# Altium PCB Amplificador Clase D.PcbDoc
Units mil, origin at the board's own origin, x right, y up, seen from the top; angles counter-clockwise.
Board outline 6000 x 4000 mil, 2 copper layers (Top Layer, Bottom Layer); 97 components, 79 nets, 264 pads, 24 vias.
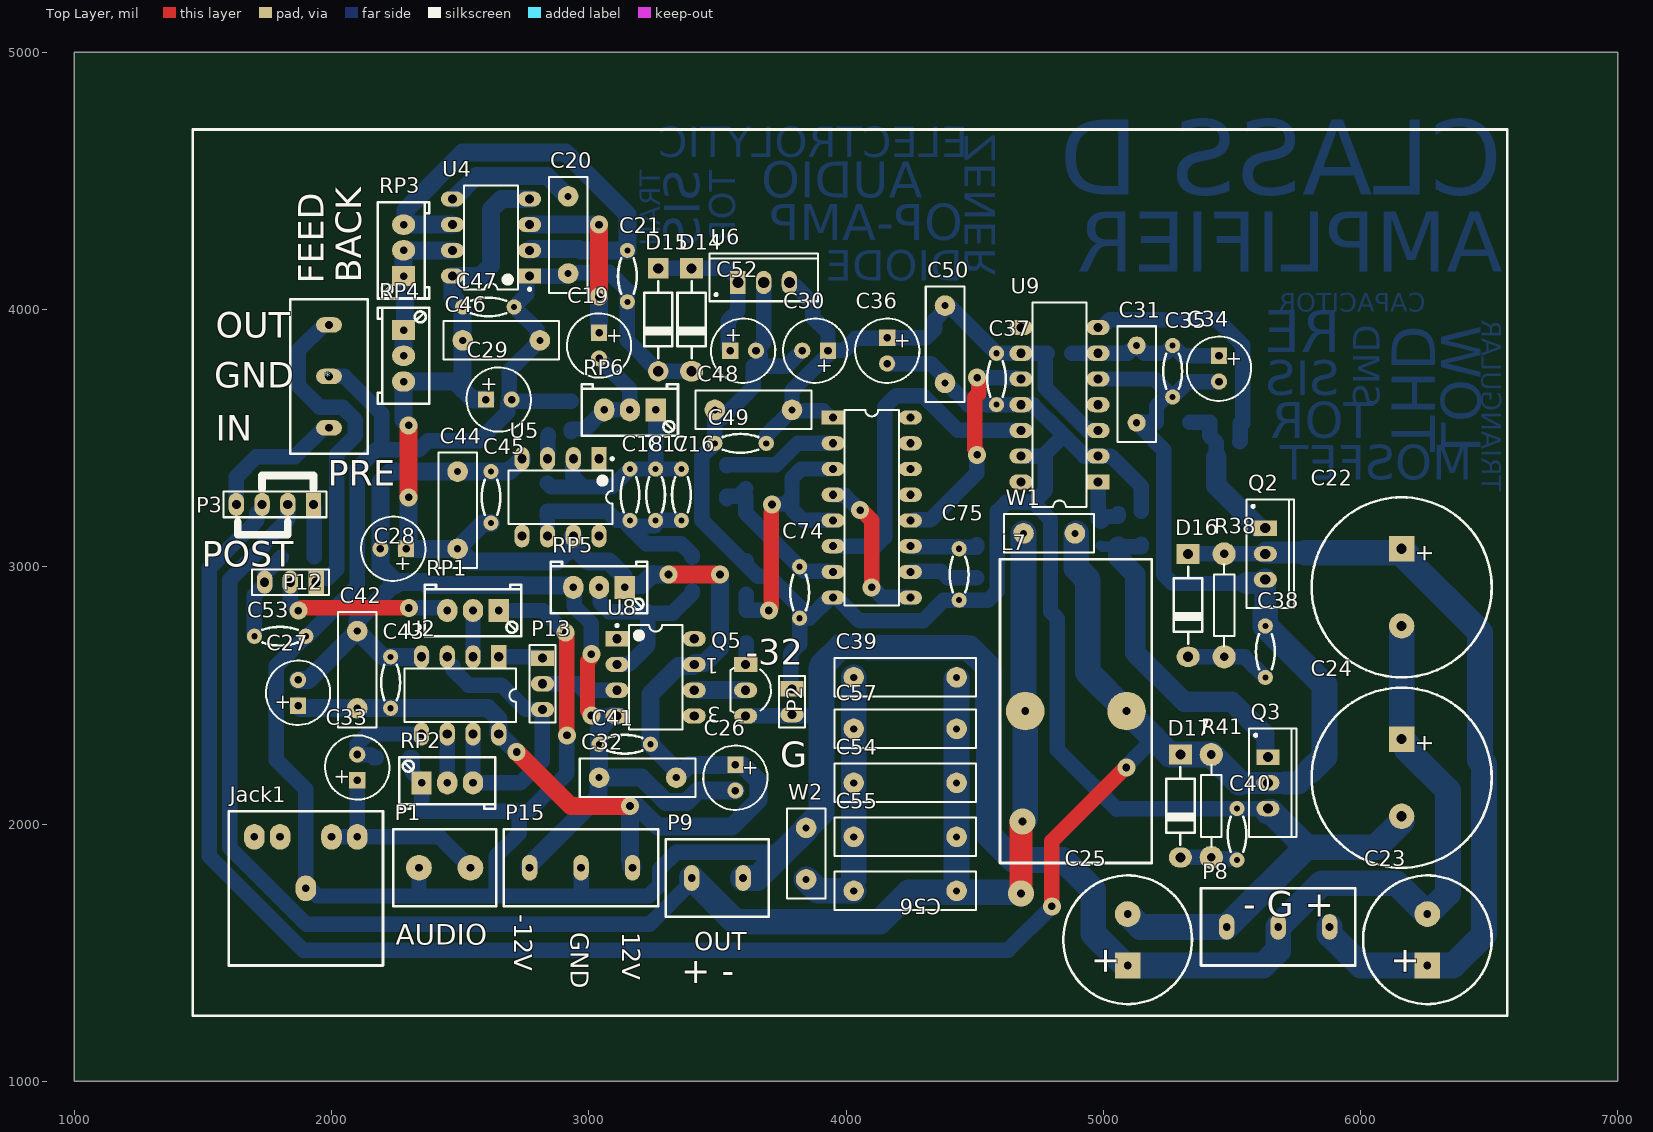
[diagram p0: Top Layer view]
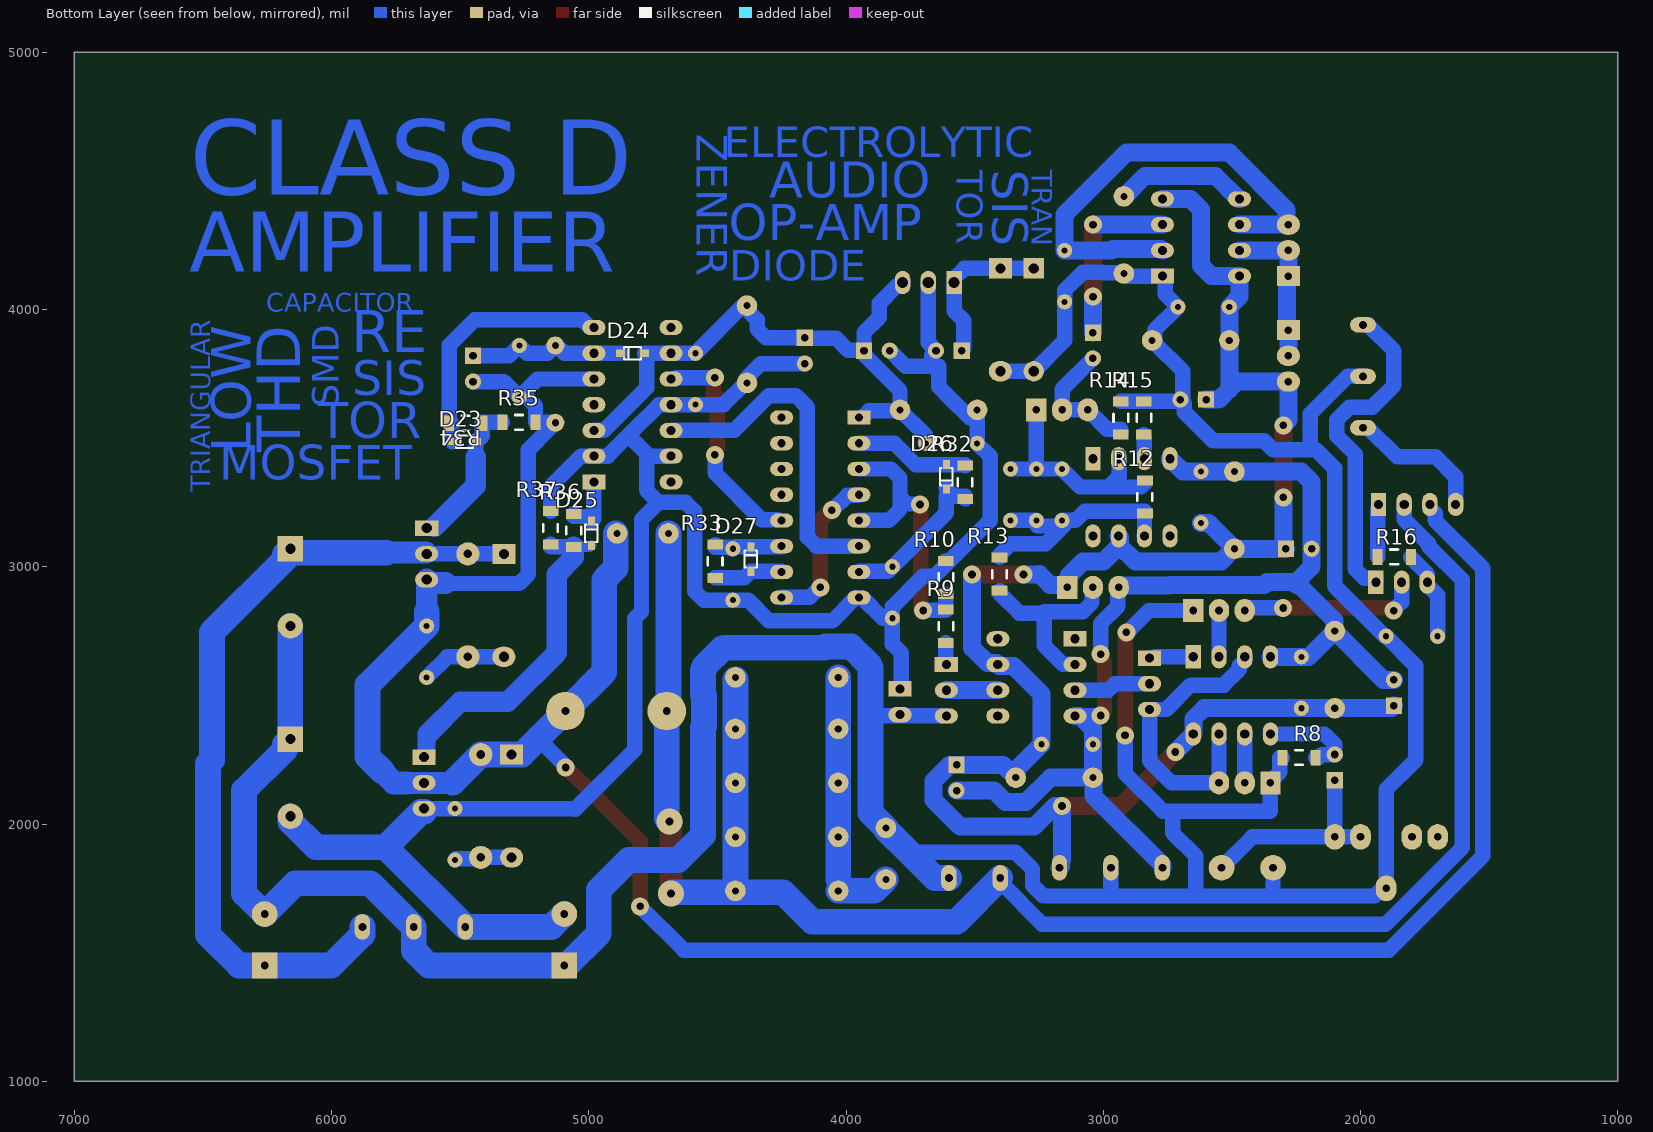
[diagram p1: Bottom Layer view, seen from below]

## Layer stack, top to bottom
Top Solder: solder mask 0.4, Solder Resist, Dk 3.5
Top Layer: signal copper 1.4
Dielectric 1: dielectric 12.6, FR-4, Dk 4.8
Bottom Layer: signal copper 1.4
Bottom Solder: solder mask 0.4, Solder Resist, Dk 3.5

## Board outline
1000,1000 7000,1000 7000,5000 1000,5000

## Design rules (kind name [scope] priority, off if disabled: settings)
Clearance [All] p1: gap=40 ignorepadtopadclearanceinfootprint=FALSE except(0: Arc-Hole Track-Hole SMDPad-Hole THPad-Hole Via-Hole Fill-Text Fill-Hole Poly-Text Poly-Hole Region-Text Region-Hole Text-Hole; 10: Arc-Text Track-Text SMDPad-SMDPad SMDPad-THPad SMDPad-Via SMDPad-Text THPad-THPad THPad-Via THPad-Text Via-Via Via-Text Text-Text; 20: Arc-Arc Arc-Track Arc-SMDPad Arc-THPad Track-Track Track-SMDPad Track-THPad; 30: Arc-Via Track-Via)
PolygonConnect [All] p1: connectstyle=Relief reliefconductorwidth=10 reliefentries=4 polygonreliefangle="90 Angle" airgapwidth=10
RoutingVias [All] p1: holewidth=30 width=70 viastyle="Through Hole" minholewidth=30 minwidth=70 maxholewidth=30 maxwidth=70
SilkToSilkClearance [All] p1: silktosilkclearance=0
SilkToSolderMaskClearance [IsPad] p1: minsilkscreentomaskgap=0 clearancetoexposedcopper=TRUE
SolderMaskExpansion [All] p1: expansion=4 istentingtop=FALSE
Width [All] p1: maxlimit=150 minlimit=20 preferedwidth=60 minimp=50.000000 maximp=50.000000 favimp=50.000000
28 further rules are at their usual default settings.

## Classes and differential pairs
component class Feedback: * C53 P3 P12 R16
component class "Positive Pwr": *2
component class "Negative Pwr": *3
component class Triangular: C16 C17 C18 C19 C20 C21 R12 R13 R14 R15 RP3 RP4 RP5 RP6 U4 U5
component class "Mosfet Driver": C31 C34 C35 C36 C37 C50 D23 D24 D25 R34 R35 R36 R37 U9
component class "Generador De Retardo": C74 C75 D26 D27 R32 R33
component class "Amplificador Clase D": C22 C23 C24 C25 C26 C27 C28 C29 C30 C32 C33 C38 C39 C40 C41 C42 C43 C44 C45 C46 C47 C48 C49 C52 C54 C55 C56 C57 D14 D15 D16 D17 Jack1 L7 P1 P2 P8 P9 P13 P15 Q2 Q3 Q5 R8 R9 R10 R38 R41 RP1 RP2 U2 U6 U8 W1 W2

## Components (designator, comment, footprint, x,y, rotation, side; value= is the part's Value field where it differs from the comment)
* "Bornera 3" "bornera 3" 1990,3540 r90 top
C16 "Cap Ceramico Disco" "CAP DISCO 200mil" 3360,3280 r90 top
C17 "Cap Ceramico Disco" "CAP DISCO 200mil" 3260,3280 r90 top
C18 "Cap Ceramico Disco" "CAP DISCO 200mil" 3160,3280 r90 top
C19 "Cap Electrolitico Radial" "CAPR D250 H450 R100 mil" 3040,3860 r270 top
C20 "Cap Ceramico Disco" RAD-0.3#1 2920,4290 r90 top
C21 "Cap Ceramico Disco" "CAP DISCO 200mil" 3150,4130 r90 top
C22 "Cap Pol1" "CAPR D700 H1400 R300 mil" 6160,2920 r270 top value=470uF/200V
C23 "Cap Pol1" "CAPR D500 H1000 R200 mil" 6260,1550 r90 top value=220uF/100V
C24 "Cap Pol1" "CAPR D700 H1400 R300 mil" 6160,2180 r270 top value=470uF/200V
C25 "Cap Pol1" "CAPR D500 H1000 R200 mil" 5095,1550 r90 top value=220uF/100V
C26 "Cap Electrolitico Radial" "CAPR D250 H450 R100 mil" 3570,2180 r270 top
C27 "Cap Electrolitico Radial" "CAPR D250 H450 R100 mil" 1870,2510 r90 top
C28 "Cap Electrolitico Radial" "CAPR D250 H450 R100 mil" 2240,3070 r180 top
C29 "Cap Electrolitico Radial" "CAPR D250 H450 R100 mil" 2650,3650 r0 top
C30 "Cap Electrolitico Radial" "CAPR D250 H450 R100 mil" 3880,3840 r180 top
C31 "Cap Ceramico Disco" RAD-0.3#2 5130,3710 r90 top
C32 "Cap Ceramico Disco" RAD-0.3#1 3190,2180 r0 top
C33 "Cap Pol1" "CAPR D250 H450 R100 mil" 2100,2220 r90 top value=10uF
C34 "Cap Pol1" "CAPR D250 H450 R100 mil" 5450,3770 r270 top value=10uF
C35 "Cap" "CAP DISCO 200mil" 5270,3760 r90 top value=0.1uF
C36 "Cap Pol1" "CAPR D250 H450 R100 mil" 4160,3840 r270 top value=10uF
C37 "Cap" "CAP DISCO 200mil" 4585,3730 r90 top value=0.1uF
C38 "Cap" "CAP DISCO 200mil" 5630,2670 r270 top value=1nF
C39 "Cap" RAD-0.4 4230,2570 r0 top value=100nF
C40 "Cap" "CAP DISCO 200mil" 5520,1960 r270 top value=1nF
C41 "Cap" "CAP DISCO 200mil" 3140,2310 r0 top value=1nF
C42 "Cap Ceramico Disco" RAD-0.3#1 2100,2600 r270 top
C43 "Cap" "CAP DISCO 200mil" 2230,2550 r270 top value=1nF
C44 "Cap Ceramico Disco" RAD-0.3#1 2490,3220 r270 top
C45 "Cap" "CAP DISCO 200mil" 2620,3270 r270 top value=1nF
C46 "Cap Ceramico Disco" RAD-0.3#1 2660,3880 r180 top
C47 "Cap" "CAP DISCO 200mil" 2610,4010 r180 top value=1nF
C48 "Cap Ceramico Disco" RAD-0.3#1 3640,3610 r0 top
C49 "Cap" "CAP DISCO 200mil" 3590,3480 r0 top value=1nF
C50 "Cap Ceramico Disco" RAD-0.3#1 4385,3865 r90 top
C52 "Cap Electrolitico Radial" "CAPR D250 H450 R100 mil" 3600,3840 r0 top
C53 "Cap" "CAP DISCO 200mil" 1800,2730 r180 top value=4.7nF
C54 "Cap" RAD-0.4 4230,2160 r0 top value=68nF
C55 "Cap" RAD-0.4 4230,1950 r0 top value=100nF
C56 "Cap" RAD-0.4 4230,1740 r0 top value=100nF
C57 "Cap" RAD-0.4 4230,2370 r0 top value=100nF
C74 "Cap" "CAP DISCO 200mil" 3820,2900 r90 top value=47pF
C75 "Cap" "CAP DISCO 200mil" 4440,2970 r90 top value=47pF
D14 "Diodo Zener" DO-41#1 3400,3960 r270 top
D15 "Diodo Zener" DO-41#2 3270,3960 r270 top
D16 "Diode 1N4148" DO-41#1 5330,2850 r270 top
D17 "Diode 1N4148" DO-41#1 5300,2070 r270 top
D23 "Diode 1N4148" SOD323-F 5483.5,3486.24 r180 bottom
D24 "Diode 1N4148" SOD323-F 4830,3830 r180 bottom
D25 "Diode 1N4148" SOD323-F 4990,3130 r270 bottom
D26 "Diode 1N4148" SOD323-F 3610,3350 r90 bottom
D27 "Diode 1N4148" SOD323-F 4370,3030 r270 bottom
Jack1 "Jack 3.5mm" "jack 3.5mm" 2100,1950 r180 top
L7 "Inductor" "Bobina 1.5*3" 4880,2450 r180 top value=33uH
P1 "Header 2H" "bornera 2"#1 2340,1830 r0 top
P2 "Header 2" HDR1X2 3790,2525 r270 top
P3 "Header 4" HDR1X4 1930,3242.5 r180 top
P8 "Header 3" "bornera 3" 5480,1600 r0 top
P9 "Header 2H" "bornera 2"#2 3400,1790 r0 top
P12 "Header 3" HDR1X3 1940,2940 r180 top
P13 "Header 3" HDR1X3 2820,2645 r270 top
P15 "Header 3" "bornera 3" 2770,1830 r0 top
Q2 "IRFZ24N" TO-220AB 5630,3050 r270 top
Q3 "IRFZ24N" TO-220AB 5640,2160 r270 top
Q5 "BS250" TO-92W 3610,2520 r180 top
R8 "Res2" "1206 resistor" 2240,2260 r180 bottom value=47K
R9 "Res1" "1206 resistor" 3610,2770 r270 bottom value=47K
R10 "Res1" "1206 resistor" 3610,2960 r270 bottom value=22K
R12 "Res SMD" "1206 resistor" 2840,3270 r90 bottom
R13 "Res SMD" "1206 resistor" 3405,2970 r90 bottom
R14 "Res SMD" "1206 resistor" 2930,3580 r270 bottom
R15 "Res SMD" "1206 resistor" 2840,3580 r270 bottom
R16 "Res1" "1206 resistor" 1870,3040 r180 bottom value=1k
R32 "Rtiempo" "1206 resistor" 3538.5,3327.24 r90 bottom value=1K5
R33 "Res2" "1206 resistor" 4510,3020 r90 bottom value=1K5
R34 "Res2" "1206 resistor" 5480,3560 r180 bottom value=10
R35 "Res2" "1206 resistor" 5270,3560 r0 bottom value=1K
R36 "Res2" "1206 resistor" 5060,3140 r90 bottom value=10
R37 "Res2" "1206 resistor" 5150,3150 r90 bottom value=1K
R38 "Res2" AXIAL-0.4 5470,2850 r90 top value=39
R41 "Res2" AXIAL-0.4 5420,2070 r90 top value=39
RP1 "Trimpot" "Trimpot Multivuelta Vertical" 2550,2830 r0 top
RP2 "Trimpot" "Trimpot Multivuelta Vertical" 2450,2160 r180 top
RP3 "Trimpot" "Trimpot Multivuelta Vertical" 2280,4230 r270 top
RP4 "Trimpot" "Trimpot Multivuelta Vertical" 2280,3820 r90 top
RP5 "Trimpot" "Trimpot Multivuelta Vertical" 3040,2920 r0 top
RP6 "Trimpot" "Trimpot Multivuelta Vertical" 3160,3610 r0 top
U2 "TL082ACJG" 693-02 2500,2500 r180 top
U4 "LM555CN" N08E 2620,4280 r180 top
U5 "LM318N" DIP-8 2890,3270 r270 top
U6 "LM78L12ACZ/NOPB" to-220 3680,4105 r0 top
U8 "LM318N" DIP-8 3260,2570 r0 top
U9 "IR2110" PDIP14 4830,3630 r90 top
W1 "Jumper" RAD-0.2 4790,3130 r180 top
W2 "Jumper" RAD-0.2 3845,1885 r270 top
? "CD4049" PDIP16 4100,3230 r270 top

## Footprints (in the part's own frame and the unit in brackets; to place one, negate y for a bottom-side part, rotate by r counter-clockwise, add the part's x,y. Pads: shape width x height; smd on the part's side, far side on the other; paste and mask are expansions set on the pad)
693-02 [mm] "DIP; 8 Leads; Row Spacing 7.62 mm; Pitch 2.54 mm"
  rect 1.5x2.286 hole 0.9: 1(-3.81,-3.81)
  oval 1.5x2.286 hole 0.9: 2(-1.27,-3.81) 3(1.27,-3.81) 4(3.81,-3.81) 5(3.81,3.81) 6(1.27,3.81) 7(-1.27,3.81) 8(-3.81,3.81)
  silkscreen extent -5.5,-2.65 5.5,2.65
"1206 resistor" [mil]
  rect 39x61 smd: 1(-63,-2) 2(66,-2)
  silkscreen extent -14,-30 16,27
AXIAL-0.4 [mil] "Axial Device, Thru-Hole; 2 Leads; 0.4 in Pin Spacing"
  round 90 hole 33.46: 1(-200,0) 2(200,0)
  silkscreen extent -160,-40 160,40
"Bobina 1.5*3" [mil]
  round 150 hole 30: 1(-210.7,11) 2(183,11)
  silkscreen extent -309,-580 281,602
"bornera 2"#1 [mil]
  round 100 hole 30: 1(0,0) 2(200,0)
  silkscreen extent -100,-150 300,150
"bornera 2"#2 [mil]
  oval 60x100 hole 30: 1(0,0) 2(200,0)
  silkscreen extent -100,-150 300,150
"bornera 3" [mil]
  oval 60x100 hole 30: 1(0,0) 2(200,0) 3(400,0)
  silkscreen extent -100,-150 500,150
"CAP DISCO 200mil" [mm] "Capacitor; 2 Leads"
  round 1.5 hole 0.6: 1(-2.54,0) 2(2.54,0)
  silkscreen extent -1.74,-0.93 1.74,0.93, body extent -3.5,-0.85 3.49,0.85, height 7.5
"CAPR D250 H450 R100 mil" [mm]
  rect 1.6x1.6 hole 0.75: 1(-1.27,0)
  round 1.6 hole 0.75: 2(1.27,0)
  silkscreen extent -3.17,-3.17 3.17,3.17, body extent -3.4,-3.39 3.37,3.39, height 2.49
"CAPR D500 H1000 R200 mil" [mil]
  rect 100x100 hole 30: 1(-100,0)
  round 100 hole 30: 2(100,0)
  silkscreen extent -250,-250 250,250
"CAPR D700 H1400 R300 mil" [mm]
  rect 2.5x2.5 hole 1: 1(-3.81,0)
  round 2.5 hole 1: 2(3.81,0)
  silkscreen extent -8.89,-8.89 8.89,8.89, body extent -9.25,-9.22 9.17,9.22, height 2.49
DIP-8 [mm] "DIP; 8 Leads; Row Spacing 7.62 mm; Pitch 2.54 mm"
  rect 2.286x1.5 hole 0.9: 1(-3.81,3.81)
  oval 2.286x1.5 hole 0.9: 2(-3.81,1.27) 3(-3.81,-1.27) 4(-3.81,-3.81) 5(3.81,-3.81) 6(3.81,-1.27) 7(3.81,1.27) 8(3.81,3.81)
  silkscreen extent -3.93,-5.15 2.65,5.24, body extent -3.6,-5.15 3.6,5.15, height 5.08
DO-41#1 [mm] "Diode, Axial; Body 5.2 x 2.7 mm (LxDia. max), Lead Dia. 0.86 mm (max)"
  rect 2x2.286 hole 1: 1(-5.08,0)
  oval 2x2.286 hole 1: 2(5.08,0)
  silkscreen extent -3.81,-1.4 3.81,1.4, body extent -5.54,-1.37 5.49,1.35, height 2.72
DO-41#2 [mm] "Diode, Axial; Body 5.2 x 2.7 mm (LxDia. max), Lead Dia. 0.86 mm (max)"
  rect 2x2 hole 1: 1(-5.08,0)
  round 2 hole 1: 2(5.08,0)
  silkscreen extent -3.81,-1.4 3.81,1.4, body extent -5.54,-1.37 5.49,1.35, height 2.72
HDR1X2 [mil] "Connector; Header; 2 Position"
  rect 60x90 hole 35.43: 1(0,0)
  oval 60x90 hole 35.43: 2(100,0)
  silkscreen extent -50,-50 150,50
HDR1X3 [mil] "Connector; Header; 3 Position"
  rect 60x90 hole 35.43: 1(0,0)
  oval 60x90 hole 35.43: 2(100,0) 3(200,0)
  silkscreen extent -50,-50 250,50
HDR1X4 [mil] "Connector; Header; 4 Position"
  rect 60x90 hole 35.43: 1(0,0)
  oval 60x90 hole 35.43: 2(100,0) 3(200,0) 4(300,0)
  silkscreen extent -50,-50 350,50
"jack 3.5mm" [mil]
  oval 80x100 hole 30: 1(0,0) 1(100,0) 2(300,0) 2(400,0) 3(200,200)
  Top Layer region: 400,400
  silkscreen extent -100,-100 500,500
N08E [mm] "DIP, 8-Leads, Row Spacing 7.62mm, Pitch 2.54mm, Body 9.91x6.35mm"
  rect 2.286x1.5 hole 0.9: 1(-3.81,3.81)
  oval 2.286x1.5 hole 0.9: 2(-3.81,1.27) 3(-3.81,-1.27) 4(-3.81,-3.81) 5(3.81,-3.81) 6(3.81,-1.27) 7(3.81,1.27) 8(3.81,3.81)
  silkscreen extent -3.94,-5.15 2.65,5.23, body extent -3.6,-5.15 3.6,5.15, height 5.34
PDIP14 [mm] "DIP; 14 Leads; Row Spacing 7.62 mm; Pitch 2.54 mm"
  rect 1.5x2.286 hole 0.9: 1(-7.62,-3.81)
  oval 1.5x2.286 hole 0.9: 2(-5.08,-3.81) 3(-2.54,-3.81) 4(0,-3.81) 5(2.54,-3.81) 6(5.08,-3.81) 7(7.62,-3.81) 8(7.62,3.81) 9(5.08,3.81) 10(2.54,3.81) 11(0,3.81) 12(-2.54,3.81) 13(-5.08,3.81) 14(-7.62,3.81)
  silkscreen extent -10.1,-2.65 10.1,2.65
PDIP16 [mm] "DIP; 16 Leads; Row Spacing 7.62 mm; Pitch 2.54 mm"
  rect 1.4x2.286 hole 0.8: 1(-8.89,-3.81)
  oval 1.4x2.286 hole 0.8: 2(-6.35,-3.81) 3(-3.81,-3.81) 4(-1.27,-3.81) 5(1.27,-3.81) 6(3.81,-3.81) 7(6.35,-3.81) 8(8.89,-3.81) 9(8.89,3.81) 10(6.35,3.81) 11(3.81,3.81) 12(1.27,3.81) 13(-1.27,3.81) 14(-3.81,3.81) 15(-6.35,3.81) 16(-8.89,3.81)
  silkscreen extent -9.65,-2.7 9.65,2.7
RAD-0.2 [mil] "Radial Cap, Thru-Hole; 2 Leads; 0.2 in Pin Spacing"
  round 80 hole 27.56: 1(-100,0) 2(100,0)
  silkscreen extent -175,-75 175,75
RAD-0.3#1 [mil] "Radial Cap, Thru-Hole; 2 Leads; 0.3 in Pin Spacing"
  round 80 hole 27.56: 1(-150,0) 2(150,0)
  silkscreen extent -225,-75 225,75
RAD-0.3#2 [mil] "Radial Cap, Thru-Hole; 2 Leads; 0.3 in Pin Spacing"
  round 70 hole 27.56: 1(-150,0) 2(150,0)
  silkscreen extent -225,-75 225,75
RAD-0.4 [mil] "Radial Cap, Thru-Hole; 2 Leads; 0.4 in Pin Spacing"
  round 80 hole 27.56: 1(-200,0) 2(200,0)
  silkscreen extent -275,-75 275,75
SOD323-F [mm]
  rect 0.9x0.7 smd: 1(1.2,0) 2(-1.2,0)
  silkscreen extent -0.85,-0.63 0.85,0.62, body extent -1.15,-0.6 1.15,0.6, height 1.07
TO-92W [mm] "TO, Flat Index; 3 In-Line, Axial Leads (Wide Pitch); Body Dia. 4.7mm; Leads 0.56 x 0.51 mm (max)"
  rect 2.286x1.5 hole 0.9: 1(0,-2.54)
  oval 2.286x1.5 hole 0.9: 2(0,0) 3(0,2.54)
  silkscreen extent -2.49,-2.19 1.51,2.19
to-220 [mil] "TO, Thru-Hole, Vertical, Heatsink Mounted; 3 In-Line Leads; Pitch 2.54 mm"
  rect 60x90 hole 43.31: 1(-100,0)
  oval 60x90 hole 43.31: 2(0,0) 3(100,0)
  silkscreen extent -211,-73 211,112, body extent -213,-75 213,114, height 902
TO-220AB [mil] "TO, Thru-Hole, Vertical, Heatsink Mounted; 3 In-Line Leads; Pitch 2.54 mm"
  rect 60x90 hole 39.37: 1(-100,0)
  oval 60x90 hole 39.37: 2(0,0) 3(100,0)
  silkscreen extent -211,-73 211,112, body extent -213,-75 213,114, height 760
"Trimpot Multivuelta Vertical" [mm] "Preset Multivuelta de ajuste vertical"
  rect 2x2.286 hole 0.75: 1(2.54,0)
  oval 2x2.286 hole 0.75: 2(-2.54,0) 3(0,0)
  silkscreen extent -4.75,-2.54 4.75,2.54, body extent -4.6,-2.41 4.6,2.39, height 12.06

## Part data
C16 C17 C18 C20 C21 C31 C32 C42 C44 C46 C48 C50: "Capacitor Ceramico de Insercion", FABRICANTE=Generico
  C16 C17 C18 C21: VALOR=1nF
  C20 C31 C32 C42 C44 C46 C48 C50: VALOR=100nF
C19 C26 C27 C28 C29 C30 C52: "Cap Electrolitico de insercion"
  C19 C29 C30: VALOR=10uF/16V
  C26 C27 C28: VALOR=10uF/50V
  C52: VALOR=1uF/50V
C22 C23 C24 C25 C33 C34 C36: "Polarized Capacitor (Radial)", LatestRevisionDate=17-Jul-2002, LatestRevisionNote="Re-released for DXP Platform.", PackageDescription="Polarized Capacitor (Radial); 2 Leads", PackageReference=RB7.6-15, Published=8-Jun-2000, Publisher="Altium Limited"
C35 C37 C38 C39 C40 C41 C43 C45 C47 C49 C53 C54 C55 C56 C57 C74 C75: "Capacitor", LatestRevisionDate=17-Jul-2002, LatestRevisionNote="Re-released for DXP Platform.", PackageDescription="Radial Cap, Thru-Hole; 2 Leads; 0.3 in Pin Spacing", PackageReference=RAD-0.3, Published=8-Jun-2000, Publisher="Altium Limited"
D16 D17 D23 D24 D25 D26 D27: "High Conductance Fast Diode", Code_JEDEC=DO-204-AH, ComponentLink1Description="Manufacturer Link", ComponentLink1URL=http://www.fairchildsemi.com/, ComponentLink2Description=Datasheet, ComponentLink2URL=http://www.fairchildsemi.com/ds/1N%2F1N4148.pdf, DatasheetVersion=1997, LatestRevisionDate=17-Jul-2002, LatestRevisionNote="Re-released for DXP Platform.", PackageDescription="Diode, Axial; Body 3.8 x 1.9 mm (LxDia. max), Lead Dia. 0.53 mm (max)", PackageReference=DO-35, Published=8-Jun-2000, Publisher="Altium Limited"
P1 P9: "Header, 2-Pin, Right Angle", LatestRevisionDate=17-Jul-2002, LatestRevisionNote="Re-released for DXP Platform.", Publisher="Altium Limited"
P2: "Header, 2-Pin", LatestRevisionDate=17-Jul-2002, LatestRevisionNote="Re-released for DXP Platform.", Publisher="Altium Limited"
P3: "Header, 4-Pin", LatestRevisionDate=17-Jul-2002, LatestRevisionNote="Re-released for DXP Platform.", Publisher="Altium Limited"
P8 P12 P13 P15: "Header, 3-Pin", LatestRevisionDate=17-Jul-2002, LatestRevisionNote="Re-released for DXP Platform.", Publisher="Altium Limited"
Q2 Q3: "HEXFET Power MOSFET", ComponentLink1Description="Manufacturer Link", ComponentLink1URL=http://www.irf.com/, ComponentLink2Description=Datasheet, ComponentLink2URL=http://www.irf.com/product-info/datasheets/data/irfz24n.pdf, DatasheetVersion=Sep-1999, LatestRevisionDate=17-Jul-2002, LatestRevisionNote="Re-released for DXP Platform.", Note="Pin 2 is electrically connected to pin 4.", PackageDescription="TO, Thru-Hole, Vertical, Heatsink Mounted; 3 In-Line Leads; Pitch 2.54 mm", PackageReference=TO-220AB, PackageVersion=Feb-1997, Published=8-Jun-2000, Publisher="Altium Limited"
Q5: library part MOSFET-P, "P-Channel MOSFET", LatestRevisionDate=17-Jul-2002, LatestRevisionNote="Re-released for DXP Platform.", PackageDescription="TO, Flat Index; 3 In-Line, Axial Leads; Body Dia. 4.6mm; Lead Dia. 0.5 mm (max)", PackageReference=E3, PackageVersion=1995/1996, Published=8-Jun-2000, Publisher="Altium Limited"
R8 R9 R10 R16 R33 R34 R35 R36 R37 R38 R41: "Resistor", LatestRevisionDate=17-Jul-2002, LatestRevisionNote="Re-released for DXP Platform.", Published=8-Jun-2000, Publisher="Altium Limited"
  R8 R33 R34 R35 R36 R37 R38 R41: PackageDescription="Axial Device, Thru-Hole; 2 Leads; 0.4 in Pin Spacing", PackageReference=AXIAL-0.4
  R9 R10 R16: PackageDescription="Axial Device, Thru-Hole; 2 Leads; 0.3 in Pin Spacing", PackageReference=AXIAL-0.3
R12 R13 R14 R15: "Res Smd"
  R12: VALOR=47K
  R13 R14: VALOR=2K7
  R15: VALOR=1K5
R32: library part Res2, "Resistor", LatestRevisionDate=17-Jul-2002, LatestRevisionNote="Re-released for DXP Platform.", PackageDescription="Axial Device, Thru-Hole; 2 Leads; 0.4 in Pin Spacing", PackageReference=AXIAL-0.4, Published=8-Jun-2000, Publisher="Altium Limited"
RP1 RP2 RP3 RP4 RP5 RP6: "Preset"
  RP1: VALOR=50K
  RP2: VALOR=100K
  RP3: VALOR=10K/6K
  RP4: VALOR=2K/520
  RP5: VALOR=25K/12k5
  RP6: VALOR=10K/770
U2: "JFET-Input Operational Amplifier", Code_JEDEC=MO-001-AN, ComponentLink1Description="Manufacturer Link", ComponentLink1URL=http://www.onsemi.com/site/products/parametrics/0,4446,251,00.html, DatasheetVersion=1988, LatestRevisionDate=06-Jun-2005, LatestRevisionNote="Stylized 3D Model Added.", PackageDescription="DIP; 8 Leads; Row Spacing 7.62 mm; Pitch 2.54 mm", PackageReference=693-02, Published=17-Jul-2002, Publisher="Altium Limited"
U4: "Timer, 8-pin MDIP", Manufacturer="National Semiconductor", PackageTopMarking=NSUZXYTTE#*LM*555CN, PowerWise=N, Supplier Part Number 1=9488235, Code_JEDEC=MS-001-BA, ComponentLink1Description="LM555 Datasheet", ComponentLink1URL=http://www.national.com/ds/LM/LM555.pdf, ComponentLink2Description="LM555 Web Page", ComponentLink2URL=http://www.national.com/pf/LM/LM555.html, ComponentLink3Description="N08E Package Page", ComponentLink3URL=http://www.national.com/packaging/folders/n08e.html, CompType="Analog IC", DatasheetVersion=Jul-2006, PackageDescription="MDIP, .365 x .250 x .130in, 8 Lead, .100in Pitch", PackageReference=N08E, PackageVersion="revG, May-2006", PartNumber=LM555CN, PinCount=8, Published=4-Dec-2008, Publisher="Altium Limited", RoHS=N, Supplier 1=Farnell
U5 U8: "Operational Amplifier, 8-pin MDIP", Manufacturer="National Semiconductor", PackageTopMarking=NSUZXYTTE#*LM*318N, PowerWise=N, Supplier Part Number 1=398550, Code_JEDEC=MS-001-BA, ComponentLink1Description="LM318 Datasheet", ComponentLink1URL=http://www.national.com/ds/LM/LM318.pdf, ComponentLink2Description="LM318 Web Page", ComponentLink2URL=http://www.national.com/pf/LM/LM318.html, ComponentLink3Description="N08E Package Page", ComponentLink3URL=http://www.national.com/packaging/folders/n08e.html, CompType=Amplifiers, DatasheetVersion=Aug-2000, PackageDescription="MDIP, .365 x .250 x .130in, 8 Lead, .100in Pitch", PackageReference=N08E, PackageVersion="revG, May-2006", PartNumber=LM318N, PinCount=8, Published=4-Dec-2008, Publisher="Altium Limited", RoHS=N, Supplier 1=Farnell
U6: "3-Terminal Positive Regulators, 3-pin TO-92, Pb-Free", Manufacturer="National Semiconductor", PackageTopMarking=NSXYTT*LM78L*12ACZ, PowerWise=N, Supplier Part Number 1=LM78L12ACZ/NOPB-ND, Code_JEDEC=TO-226-AA, ComponentLink1Description="LM78L12 Datasheet", ComponentLink1URL=http://www.national.com/ds/LM/LM78L12.pdf, ComponentLink2Description="LM78L12 Web Page", ComponentLink2URL=http://www.national.com/pf/LM/LM78L12.html, ComponentLink3Description="Z03A Package Page", ComponentLink3URL=http://www.national.com/packaging/folders/z03a.html, CompType="LDO IC", DatasheetVersion=Apr-2006, PackageDescription="TO-92, Molded, 3 Lead", PackageReference=Z03A, PackageVersion="revG, Sep-2000", PartNumber=LM78L12ACZ/NOPB, PinCount=3, Published=1-Mar-2010, Publisher="Altium Limited", RoHS=Y, Supplier 1=Digi-Key, Supplier 2=Farnell, Supplier Part Number 2=1469110
U9: "High and Low Side Driver", ComponentLink1Description="Manufacturer Link", ComponentLink1URL=http://www.irf.com/, ComponentLink2Description=Datasheet, ComponentLink2URL=http://www.irf.com/product-info/datasheets/data/ir2110.pdf, DatasheetVersion=PD60147J, LatestRevisionDate=04-Mar-2005, LatestRevisionNote="Stylized 3D Model Added.", Note="Pins 4, 8 and 14 are not connected", PackageDescription="DIP; 14 Leads; Row Spacing 7.62 mm; Pitch 2.54 mm", PackageReference=PDIP14, Published=8-Jun-2000, Publisher="Altium Limited"
W1 W2: "Jumper Wire", LatestRevisionDate=17-Jul-2002, LatestRevisionNote="Re-released for DXP Platform.", PackageDescription="Radial Cap, Thru-Hole; 2 Leads; 0.2 in Pin Spacing", PackageReference=RAD-0.2, Published=24-Mar-1999, Publisher="Altium Limited"
D14 D15: VALOR=1N4742
L7: Code_IEC=1005, Code_JEITA=0402, LatestRevisionDate=29-May-2009, LatestRevisionNote="IPC-7351 Footprint Added.", PackageDescription="Chip Inductor", PackageReference=0402-A, Published=8-Jun-2000, Publisher="Altium Limited"

## Via types
v1: diameter 70, hole 30, Top Layer to Bottom Layer, 22 vias
v2: diameter 100, hole 30, Top Layer to Bottom Layer, 2 vias

## Nets (pads, with @x,y where several pads share a name; then routed paths per layer and width w, separated by ;. In a path a pad name is that pad's centre, name@x,y a point inside that pad or via, vN(x,y) a via of type N, cw(c..) or ccw(c..) an arc to the next point about the centre after c; other vN are vias at no path point)
12V: C26.1 C27.1 C28.1 C29.1 C32.2 C41.2 C42.2 C43.2 C44.2 C45.2 C46.2 C47.2 P15.3 RP4.2 RP5.1 U2.8 U4.4 U4.8 U5.7 U8.7 | length 7343
  Top Layer w70: v1(2300,3270) v1(2300,3550) ; v1(2720,2280) 2930,2070 v1(3160,2070) ; v1(3310,2970) v1(3510,2970)
  Bottom Layer w70: C27.1 1880,2450 C42.2 C43.2 2608.99,2450 2650,2408.99 U2.8 v1(2720,2280) ; v1(2300,3270) 2300,3080 C28.1 C44.2 ; v1(2300,3550) 2280,3570 RP4.2 2480,3720 2510,3690 ; C29.1 2550,3650 2510,3690 ; C45.2 2590,3170 C44.2 ; U4.4 2661.01,4430 2620,4388.99 2620,4171.01 2578.99,4130 U4.8 2470,4050 C47.2 C46.2 2510,3720 2510,3690 ; U5.7@2940,3078.29 2998.29,3020 3079.09,3020 3135.63,2963.46 3135.63,2924.37 RP5.1 ; U5.7 2934.53,3114.53 2934.53,3079.52 2875.01,3020 2542.71,3020 2492.71,3070 C44.2 ; RP5.1@3140,2930 3206.82,2930 3247.82,2971.01 3248.83,2970 v1(3310,2970) ; P15.3 3165,1835 3165,1855 3160,1860 v1(3160,2070) 3188.37,2070 3268.37,1990 3557.28,1990 3660,2092.72 3660,2167.28 3597.28,2230 C26.1 3390,2230 C32.2 3338.09,2181.91 3338.09,2211.91 C41.2 3240,2505.01 3349.52,2614.53 3404.53,2614.53 U8.7 3415.47,2625.47 3450.48,2625.47 3510,2684.99 v1(3510,2970)
32V: C22.1 C23.1 D16.1 P8.3 Q2.2 R38.2 | length 3195.3
  Bottom Layer w60: D16.1 R38.2 Q2.2
  Bottom Layer w85: Q2.2@5632.5,3055 5785,3055
  Bottom Layer w100: 5785,3055 6145,3055 C22.1 6181.14,3048.86 6181.14,3028.86 6465,2745 6465,2248.81 6480,2233.81 6480,1570 6360,1450 C23.1 6000.56,1450 5880,1570.56 P8.3
-12V: C26.2 C27.2 C28.2 C32.1 C41.1 C42.1 C43.1 C44.1 C45.1 P15.1 RP5.2 U2.4 U5.4 U8.4 | length 4533.9
  Top Layer w60: v1(3010,2421.75) 3010,2424.46 2995,2439.46 2995,2632.29 3010,2647.29 v1(3010,2660)
  Bottom Layer w60: RP5.2 2943.59,2916.41 2943.59,2845.76 3010,2779.35 v1(3010,2660) ; v1(3010,2421.75) 3011.75,2420 U8.4
  Bottom Layer w70: C27.2 1910,2560 C42.1 ; C43.1 C43.1@2230,2648.27 ; U2.4 2348.27,2648.27 C43.1@2230,2648.27 ; U5.4 2740,3415.47 2734.53,3410 2730,3410 2690,3370 C45.1 C44.1 2231.01,3370 2190,3328.99 C28.2 2190,3000 2240,2950 2240,2930 ; P15.1 2770,1840 3038.09,2108.09 3038.09,2178.09 C32.1 C41.1 3040,2370 3090,2420 U8.4 ; RP5.2 2940,2923.26 2935.96,2927.3 2745.96,2927.3 2743.26,2930 2373.18,2930 2363.18,2940 2259.29,2940 2249.29,2930 2240,2930 ; C32.1@3042.71,2180 3205.65,2180 3300.65,2085 3379.35,2085 3424.35,2130 C26.2 ; C42.1 2101.91,2751.91 2101.91,2791.91 2240,2930 ; C42.1 2201.73,2648.27 C43.1@2230,2648.27
-20V: ?.1 C30.1 C36.1 C37.2 C48.2 C49.2 C50.2 D24.1 U6.3 U9.3 U9.9 | length 2402.3
  Bottom Layer w60: C49.2 3690,3510 C48.2 ; U6.3 3780,4090 3805,4090 3870.74,4024.26 3870.74,3969.26 3930,3910 C30.1 ; ?.1@3935,3582.44 3911.27,3606.17 3793.83,3606.17 C48.2 ; U9.3 4940,3530 4775,3695 4775,3822.23 D24.1 U9.9 C37.2 4400,4015 C50.2 4385,3999.59 4345.56,3960.15 4345.56,3925.15 4310.41,3890 C36.1 4158.5,3888.5 4038.5,3888.5 3991.5,3841.5 3931.5,3841.5 3931.5,3838.5 3928.5,3838.5 3928.5,3823.25 3790,3684.75 C48.2
-32V: ?.8 C24.2 C25.2 C30.2 C36.2 C37.1 C40.1 C48.1 C49.1 C50.1 C52.2 C74.1 C75.1 P2.1 P8.1 Q3.3 R10.1 R37.2 U6.2 U9.2 U9.11 U9.13 | length 8501.8
  Bottom Layer w60: C48.1 3490,3580 C49.1 3440,3430 3440,3180 R10.1@3599,3021 ; 3520,3580 3596.94,3656.94 3640,3700 3640,3779.43 ; R10.1 3601,3023 R10.1@3599,3021 ; C52.2 3650,3839.19 3666.68,3822.51 3666.68,3779.43 3768.62,3779.43 3829.19,3840 C30.2 ; C52.2@3650,3840.81 3680,3870.81 U6.2 ; P2.1 3785,2525 3785,2664.35 3820,2699.35 C74.1 ; ?.8@3935,2877.56 3857.44,2800 C74.1 ; ?.8@3962.56,2880 4052.56,2790 4300,2790 4380,2870 C75.1 4553.35,2870 4588.5,2905.15 4588.5,3215.33 4623.65,3250.47 4728.41,3250.47 ; C36.2 4184,3790 4184.57,3789.43 4330.57,3789.43 4385,3735 C50.1 4390.41,3715 4475.41,3630 U9.11 ; U9.13 4770,3430 ; U9.11@4695,3629.53 4727.34,3629.53 4833.43,3523.43 4926.86,3430 U9.2 5030,3430 5148,3312 R37.2 ; 4765,3430 4845.93,3510.93 ; 4775,3425 4775,3297.06 4728.41,3250.47 ; Q3.3 C40.1 5055,2060 5052.5,2057.5 4822,2288 4822,2798.83 4795,2825.83 4795,3183.89 4728.41,3250.47 ; R10.1@3599,3021 3656.5,2963.5 3700.85,2963.5 3820,2844.35 C74.1
  Bottom Layer w100: C25.2 5145,1600 P8.1 5790,1910 ; Q3.3@5640,2047.5 5652.5,2047.5 5790,1910 ; C24.2 6160,2010 6060,1910 5790,1910
GND: *.2 C20.1 C21.1 C22.2 C23.2 C24.1 C25.1 C29.2 C46.1 C47.1 C53.1 D14.2 D15.2 Jack1.3 P1.1 P2.2 P8.2 P9.2 P15.2 Q5.3 R8.1 R14.1 R15.1 RP1.1 RP2.1 U4.1 W2.1 | length 15115.9
  Top Layer w60: v1(2910,2745) 2915,2740 v1(2915,2345)
  Bottom Layer w60: Jack1.3@1900,1745.41 1909.24,1736.17 1928.97,1736.17 1945.15,1720 2340,1720 ; Jack1.3 1900,2134.62 1785,2249.62 1785,2615 C53.1 1905.77,2730 2100,2924.23 2100,3382.19 2172.81,3455 2339.35,3455 2374.35,3490 2573.7,3490 2685,3601.3 2685,3634.19 2700,3649.19 C29.2 ; *.2 2050,3740 2195,3595 2195,3455 ; R8.1 2313,2258 2313.5,2257.5 2313.5,2202.13 2350,2165.63 RP2.1 2350,2050 2730,2050 ; P1.1 2340,1720 ; RP1.1 2822.29,2830 2907.29,2745 v1(2910,2745) ; C46.1 C46.1@2800.15,3870.15 ; v1(2915,2345) 2915,2197.01 2767.99,2050 2730,2050 ; R14.1 R15.1 2707.81,3643 2700.81,3650 C29.2 ; P15.2 2970,1720 ; D14.2 D15.2 3150,3880 C21.1 3150,4074.35 3079.35,4145 3000.65,4145 2999.48,4143.83 2929.24,4143.83 2925.41,4140 C20.1 2914.59,4140 2904.59,4130 U4.1 2759.24,4130 2758.76,4129.53 2758.76,4058.76 C47.1 2800.15,3919.85 C46.1@2800.15,3870.15 ; Q5.3 P2.2@3790,2420 ; 3755,1890 3340,1890 3275,1825 3275,1761.86 3233.14,1720 2970,1720 ; P2.2 P2.2@3790,2420 ; 3905,2420 P2.2@3790,2420 ; 2340,1720 2640,1720 ; 2640,1720 2970,1720 ; 2640,1720 2640,1875 2730,1965 2730,2050 ; C29.2 2690.57,3659.43 2690.57,3760.57 C46.1@2800.15,3870.15
  Bottom Layer w100: P9.2 3655,1790 3755,1890 3845,1980 W2.1 3846.42,1985 3905,2043.58 3905,2420 3905,2607.63 3910,2612.63 3910,2619.71 3980.29,2690 3980.29,2687.07 3983.22,2690 4079.71,2690 4084.71,2685 4470.65,2685 4472.63,2683.02 4479.71,2683.02 4550,2612.72 4550,2605.65 4556.22,2599.43 4556.22,2503.28 4552,2499.06 4552,2378.94 4556.22,2374.72 4556.22,1956.15 4652.37,1860 4845,1860 4961.32,1743.68 4961.32,1573.68 C25.1@5085,1450 ; C25.1 C25.1@5085,1450 ; C22.2 C24.1 6181.02,2308.98 6181.02,2288.98 6340,2130 6340,1730 C23.2 6140,1770 5850,1770 P8.2 5680,1508.58 5621.42,1450 C25.1@5085,1450
Net*2_1: 
Net*2_2: 
Net*2_3: 
Net*2_4: 
Net*2_5: 
Net*2_6: 
Net*3_2: 
Net*3_4: 
Net*3_5: 
Net*3_6: 
Net*_1: *.1 P3.4 | length 546.2
  Bottom Layer w60: P3.4 1630,3350 1707.92,3427.92 1857.92,3427.92 1970,3540 *.1
Net*_3: *.3 P12.1 | length 1294.9
  Bottom Layer w60: P12.1 1940,2955 1984.85,2955 2020,2990.15 2020,3436.86 2092.81,3509.67 2092.81,3570.33 2043.14,3620 1955,3620 1870,3705 1870,3840 1970,3940 *.3
Net_2: ?.2 D26.1 R32.2 | length 451.5
  Bottom Layer w60: R32.2 3536.5,3396.74 3537,3397.24 3729.25,3397.24 3812.01,3480 ?.2
Net_3: ?.3 ?.5 R9.1 R10.2 | length 1135.1
  Top Layer w60: v1(3700,2830) 3702.71,2830 3700,2832.71 3710,2842.71 3710,3209.35 3710.26,3209.61 3710.26,3240.26 v1(3712.18,3242.18)
  Bottom Layer w60: R9.1@3612,2832 R10.2 ; R9.1@3612.5,2831.5 3698.5,2831.5 v1(3700,2830) ; v1(3712.18,3242.18) 3714.09,3244.09 3762.96,3244.09 3790,3271.12 ; ?.5 3833.14,3180 3790,3223.14 3790,3301.12 3790,3344.85 3825.15,3380 ?.3
Net_4: ?.4 ?.9 | length 617.9
  Top Layer w60: v1(4055,3220) 4059.85,3220 4100,3179.85 v1(4100,2920)
  Bottom Layer w60: ?.4 3952.44,3277.56 3994.74,3277.56 4052.29,3220 v1(4055,3220) ; v1(4100,2920) 4102.44,2920 4140.15,2882.29 4247.71,2882.29 ?.9
Net_6: ?.6 U9.12 | length 1324
  Bottom Layer w60: ?.6 4114.85,3080 4150,3115.15 4150,3620 4195,3665 4300,3665 4435,3530 U9.12
Net_7: ?.7 C74.2 D26.2 R32.1 | length 595.3
  Bottom Layer w60: R32.1 3536.5,3274.24 3537,3274.74 3581.98,3274.74 D26.2 ; 3609.99,3274.74 3609.99,3210.01 3837.56,2982.44 3947.56,2982.44 ?.7
Net_10: ?.10 D27.1 R33.1 | length 269.8
  Bottom Layer w60: ?.10 4252.44,2982.44 4369.7,2982.44 D27.1 4395.27,2957.5 4507.5,2957.5 R33.1
Net_11: ?.11 C75.2 D27.2 R33.2 | length 274.6
  Bottom Layer w60: ?.11 4252.44,3077.56 4369.7,3077.56 D27.2 4432.76,3077.24 C75.2 4443.79,3070 4449.29,3075.5 4507.5,3075.5 4508,3076 R33.2
Net_12: ?.12 U9.10 | length 875.4
  Top Layer w60: v1(4510,3435) 4508.09,3436.91 4508.09,3449.62 4500,3457.71 4500,3657.47 4515.38,3672.85 4515.38,3722.55 4511.91,3726.02 4511.91,3733.09 v1(4510,3735)
  Bottom Layer w60: ?.12@4265,3182.44 4327.44,3182.44 4508.09,3363.09 4508.09,3433.09 v1(4510,3435) ; v1(4510,3735) 4660.47,3735 4665.47,3730 U9.10
NetC2_1: 
NetC3_1: 
NetC6_1: 
NetC7_2: 
NetC9_1: 
NetC13_1: 
NetC14_2: 
NetC16_1: C16.1 C17.1 C18.1 R12.1 R13.2 U5.6 | length 928.9
  Bottom Layer w60: R12.1 2838,3214.5 2838.5,3215 3072.94,3215 3107.94,3180 C18.1 ; R12.1@2838.5,3196.5 2839.53,3195.47 2839.53,3120.47 U5.6 ; C17.1@3256,3158.5 3154,3158.5 3222.5,3090 3359,3090 3403,3046 R13.2 ; C17.1 C16.1
NetC16_2: C16.2 C17.2 C18.2 R12.2 RP6.1 U5.2 | length 914.8
  Bottom Layer w60: R12.2@2839,3325 2854,3310 2979.55,3310 ; U5.2 2940,3405.47 2937.36,3402.83 2937.36,3352.18 2979.55,3310 ; RP6.1 C17.2 ; C16.2 C17.2 ; 2979.55,3310 3090,3310 C18.2 C17.2
NetC19_1: C19.1 U4.3 | length 690
  Top Layer w70: v1(3040,4050) v1(3040,4330)
  Bottom Layer w70: U4.3 v1(3040,4330) ; C19.1 v1(3040,4050)
NetC19_2: C19.2 R14.2 RP6.2 RP6.3 | length 519.5
  Bottom Layer w60: R14.2@2932,3524 2932,3534 2932.5,3534.5 2985.06,3534.5 3060,3609.44 RP6.2 RP6.3 3159.37,3610.63 3159.37,3690.63 C19.2
NetC20_2: C20.2 U4.5 | length 520.4
  Bottom Layer w70: U4.5 2474.53,4430 2564.53,4520 2837.29,4520 2917.29,4440 C20.2
NetC21_2: C21.2 RP3.2 U4.2 U4.6 | length 1830.7
  Bottom Layer w70: U4.6 RP3.2 2283.26,4330 2287.3,4334.04 2287.3,4387.3 2510,4610 2910,4610 3150,4370 C21.2 2967.5,4230 2962.5,4235 2775,4235 U4.2
NetC31_1: C31.1 C34.2 C35.1 C38.1 D17.1 L7.1 P3.3 Q2.3 Q3.2 R35.1 R41.2 U9.5 W1.1 | length 10017.6
  Top Layer w60: v1(4800,1680) 4800,1933.5 5086.5,2220 v1(5090,2220)
  Bottom Layer w60: P3.3 1730,3227.5 1710,3207.5 1710,3180.27 1524,2994.27 1524,1875.58 1889.58,1510 4630,1510 v1(4800,1680) ; U9.5 5200,3730 C35.1 ; v1(5090,2220) 5085,2220 5197.35,2332.35 ; C31.1 5131.91,3561.91 5194.91,3561.91 5195,3562 R35.1 5207,3624.85 5242.15,3660 C35.1 ; C31.1@5150,3540 5235,3455 5235,2970.15 5270.15,2935 5553.55,2935 5556.05,2937.5 ; C34.2 5330,3720 C35.1
  Bottom Layer w85: 5530,2160 Q3.2 5706.92,2160 ; 5556.05,2937.5 5627.5,2937.5 Q2.3@5630,2940 ; 5630,2825 Q2.3@5630,2940 ; Q2.3 Q2.3@5630,2940
  Bottom Layer w90: 5706.92,2160 5758.35,2160 5801.42,2203.08
  Bottom Layer w100: W1.1@4895,3130 4895,2995 4940,2950 4940,2589.7 L7.1 5195.63,2334.07 5259.7,2270 D17.1 R41.2 5530,2160 ; 5630,2825 C38.1 5860,2540 5860,2261.65 5801.42,2203.08
NetC31_2: C31.2 C34.1 C35.2 D24.2 U9.6 | length 626.6
  Bottom Layer w60: D24.2@4877.26,3830 5095,3830 5125,3860 C31.2 5160,3830 5240,3830 C35.2 5310,3820 C34.1
NetC33_1: C33.1 Jack1.1 P1.2 | length 809.7
  Bottom Layer w60: Jack1.1@2000,1950 Jack1.1@2100,1950 ; C33.1 Jack1.1@2100,1950 ; P1.2 2420,1950 Jack1.1@2100,1950
NetC33_2: C33.2 R8.2 U2.5 | length 385.5
  Bottom Layer w60: R8.2 2164,2258 2152.57,2269.43 2100.57,2269.43 C33.2 2100.57,2270.57 2100.57,2310.57 2140,2350 U2.5
NetC38_2: C38.2 D16.2 R38.1 | length 333.1
  Bottom Layer w60: D16.2 R38.1 5550,2650 C38.2
NetC39_1: C39.1 C54.1 C55.1 C56.1 C57.1 W2.2 | length 988.6
  Bottom Layer w100: W2.2 3890,1740 C56.1 ; 4030,1785 C55.1 C54.1 C57.1 C39.1
NetC39_2: C39.2 C54.2 C55.2 C56.2 C57.2 L7.2 P3.2 P9.1 W1.2 | length 7058.3
  Top Layer w90: v2(4680,1730) 4680,2001.08 4686.22,2007.29 v2(4686.22,2010)
  Bottom Layer w60: P3.2 1830,3184.71 1734.5,3089.21 1734.5,3079.5 1604,2949 1604,1908.72 1902.72,1610 3236.27,1610 3396.27,1770 3400,1770 P9.1@3400,1781.86
  Bottom Layer w100: P9.1 3570,1620 4130,1620 4245,1735 4430,1735 4675,1735 v2(4680,1730) ; C56.2 C55.2 C54.2 C57.2 C39.2@4430,2563.02 ; v2(4686.22,2010) 4697,2020.78 L7.2 4690,2446 W1.2
NetC40_2: C40.2 D17.2 R41.1 | length 224.1
  Bottom Layer w60: D17.2 R41.1 5425.74,1864.26 5515.74,1864.26 C40.2
NetC52_1: C52.1 D14.1 D15.1 U6.1 | length 626
  Bottom Layer w60: D15.1 D14.1 3540,4160 3580,4120 U6.1 3580,3995 3541.5,3956.5 3541.5,3848.5 C52.1
NetC53_2: C53.2 P12.3 R16.2 | length 369.3
  Bottom Layer w60: C53.2 1700,2889.85 1735.15,2925 P12.3@1740,2925 ; P12.3 P12.3@1740,2925 ; R16.2 1804.5,3037.5 1804.5,3036.36 1740,2971.86 P12.3@1740,2925
NetD1_2: 
NetD1_4: 
NetD3_2: 
NetD4_2: 
NetD7_2: 
NetD9_2: 
NetD10_2: 
NetD13_2: 
NetD23_1: D23.1 Q2.1 R34.2 R35.2 | length 577
  Bottom Layer w60: R35.2 5414,3562 5414,3508.49 D23.1 5440,3482.49 5440,3425 ; Q2.1@5615,3150 Q2.1
  Bottom Layer w80: 5440,3425 5440,3315 Q2.1@5600,3155
NetD23_2: D23.2 R34.1 U9.7 | length 976.1
  Bottom Layer w60: U9.7@4995,3930.47 5024.53,3960 5443.7,3960 5543,3860.7 R34.1 ; D23.2 5532.5,3487.99 R34.1@5532.5,3557.5
NetD25_1: D25.1 Q3.1 R36.1 R37.1 | length 1472.3
  Bottom Layer w40: D25.1 4995.27,3077.5 5057.5,3077.5 R36.1
  Bottom Layer w60: 5058,3040 R36.1 ; R36.1@5062.71,3077 5147.5,3077 5148,3077.5 R37.1 ; Q3.1 Q3.1@5636.36,2260 ; Q3.1@5636.36,2260 5625,2260 5625,2350 5636.36,2338.64 Q3.1@5636.36,2260
  Bottom Layer w80: R36.1 5058,3037 5125,2970 5125,2665 5315,2475 5500,2475 5625,2350
NetD25_2: D25.2 R36.2 U9.1 | length 244.3
  Bottom Layer w60: U9.1 4980,3187.26 D25.2@4990.76,3176.5 ; D25.2 D25.2@4990.76,3176.5 ; R36.2 5058,3196 5057.5,3195.5 5009.76,3195.5 D25.2@4990.76,3176.5
NetF1_1: 
NetF1_2: 
NetP3_1: P3.1 R16.1 | length 205.7
  Bottom Layer w60: P3.1 1930,3230 1933,3227 R16.1
NetP7_1: 
NetP11_1: 
NetP12_2: P12.2 RP1.2 | length 711.6
  Top Layer w60: v1(1870.71,2829.29) 1873.42,2829.29 1884.13,2840 v1(2300.71,2840)
  Bottom Layer w60: P12.2 1840,2862.71 1870.71,2832 v1(1870.71,2829.29) ; v1(2300.71,2840) 2421.12,2840 2421.9,2839.22 2441.34,2839.22 2450,2830.56 RP1.2
NetP13_1: P13.1 U2.1 | length 172.1
  Bottom Layer w60: U2.1 2800,2650 2805,2645 P13.1
NetP13_2: P13.2 U8.3 | length 300.4
  Bottom Layer w60: P13.2 2955,2545 2979.53,2520.47 3109.53,2520.47 U8.3
NetP13_3: P13.3 RP2.2 U2.3 U2.7 | length 1166.1
  Bottom Layer w60: U2.3 2450,2635.47 2470.47,2615 2470.47,2601.59 2532.06,2540 2660,2540 2755,2445 P13.3 2820,2245.65 2734.35,2160 RP2.2 U2.7
NetQ5_1: Q5.1 R9.2 | length 85.4
  Bottom Layer w60: Q5.1 3611.03,2620 3611.5,2620.47 3611.5,2703.5 R9.2
NetQ5_2: Q5.2 U8.6 | length 200
  Bottom Layer w70: U8.6 Q5.2
NetR2_1: 
NetR6_1: 
NetR13_1: R13.1 RP5.3 U8.2 | length 757.7
  Bottom Layer w60: RP5.3 3043.59,2916.41 3043.59,2861.33 3079.92,2825 3230,2825 3230,2694.76 3155.71,2620.47 3110.47,2620.47 U8.2 ; 3230,2820 3326,2820 3403,2897 R13.1
NetR15_2: R15.2 U5.3 | length 94.8
  Bottom Layer w60: U5.3 2840,3502 2842,3504 R15.2
NetRP1_3: RP1.3 U2.2 | length 180
  Bottom Layer w60: U2.2 RP1.3
NetRP2_3: RP2.3 U2.6 | length 190
  Bottom Layer w60: RP2.3 U2.6
NetRP3_1: RP3.1 RP3.3 RP4.1 RP4.3 U4.7 | length 604.5
  Bottom Layer w70: RP4.3 2280,3933.21 2285,3938.21 2285,4125.63 2280.63,4130 RP3.1 RP3.3 U4.7
pads on no net: ?.13 ?.14 ?.15 ?.16 Jack1.2 U5.1 U5.5 U5.8 U8.1 U8.5 U8.8 U9.4 U9.8 U9.14

## Polygon pours and split planes (outlines as drawn)
GND on Bottom Layer "GND_L02_P000" (solid, pour order 0): 7595,5110 12705,5110 12705,1665 7595,1665

## Other copper
Bottom Layer:
  text "ZENER" at 4620,4682.64 h203 r90
  text "ELECTROLYTIC" at 4475.75,4552.38 h203
  text "TRAN" at 3305,4543.17 h135 r90
  text "SIS" at 3477.61,4542.45 h237 r90
  text "TOR" at 3602.97,4542.09 h173 r90
  text "AUDIO" at 4298.45,4387.81 h240
  text "CLASS D" at 6551.56,4350 h500
  text "OP-AMP" at 4455.2,4222.81 h240
  text "DIODE" at 4453.18,4072.38 h203
  text "AMPLIFIER" at 6552.68,4070 h399
  text "CAPACITOR" at 6253.54,3966.44 h123
  text "RE" at 5922.42,3780 h280
  text "SIS" at 5919.66,3622.7 h230
  text "SMD" at 5937.09,3619.35 h178 r270
  text "TOR" at 6051.81,3452.81 h240
  text "THD" at 6065,3445.43 h290 r270
  text "LOW" at 6263.1,3443.78 h265 r270
  text "MOSFET" at 6436.63,3292.67 h228
  text "TRIANGULAR" at 6446.5,3291 h128 r270

## Silkscreen, mask and mechanical layers (free items; w line width, h text height)
Top Overlay:
  lines w10: 1460,1255 6570,1255 6570,4700 1460,4700 1460,1255
  lines w30: 1635,3175 1635,3125 1830,3125 1830,3175 ; 1730,3305 1730,3355 1930,3355 1930,3305
  text "BACK" at 2115,4105 h100 r90
  text "FEED" at 1970,4100 h100 r90
  text "OUT" at 1550,3890 h100
  text "GND" at 1545,3695 h100
  text "IN" at 1550,3490 h100
  text "PRE" at 1985,3315 h100
  text "POST" at 1495,3000 h100
  text "-32" at 3610,2620 h100
  text "G" at 3745,2220 h100
  text "-12V" at 2710,1650 h70 r270
  text "- G +" at 5545,1640 h100
  text "GND" at 2930,1580 h70 r270
  text "12V" at 3130,1580 h70 r270
  text "AUDIO" at 2250,1530 h80
  text "OUT" at 3410,1510 h70
  text "+ -" at 3360,1380 h100

## Dimensions
6570,4700 to 6570,1255 on Top Overlay
1460,4700 to 6570,4700 on Top Overlay

## Text inside footprints (layer, text, board x,y; h text height)
C19: Top Overlay "+" at 3075,3931 h60 r270
C22: Top Overlay "+" at 6220,3090 h65 r270
C23: Top Overlay "+" at 6216.66,1410 h100 r90
C24: Top Overlay "+" at 6220,2350 h65 r270
C25: Top Overlay "+" at 5051.66,1410 h100 r90
C26: Top Overlay "+" at 3605,2251 h60 r270
C27: Top Overlay "+" at 1835,2439 h60 r90
C28: Top Overlay "+" at 2311,3035 h60 r180
C29: Top Overlay "+" at 2579,3685 h60
C30: Top Overlay "+" at 3951,3805 h60 r180
C33: Top Overlay "+" at 2065,2149 h60 r90
C34: Top Overlay "+" at 5485,3841 h60 r270
C36: Top Overlay "+" at 4195,3911 h60 r270
C52: Top Overlay "+" at 3529,3875 h60
Q5: Top Overlay "1" at 3505.67,2644.8 h59.05 r180; Top Overlay "3" at 3512.76,2456.22 h59.05 r180